# EAGLE board schematic (EAGLE 9.3.0)
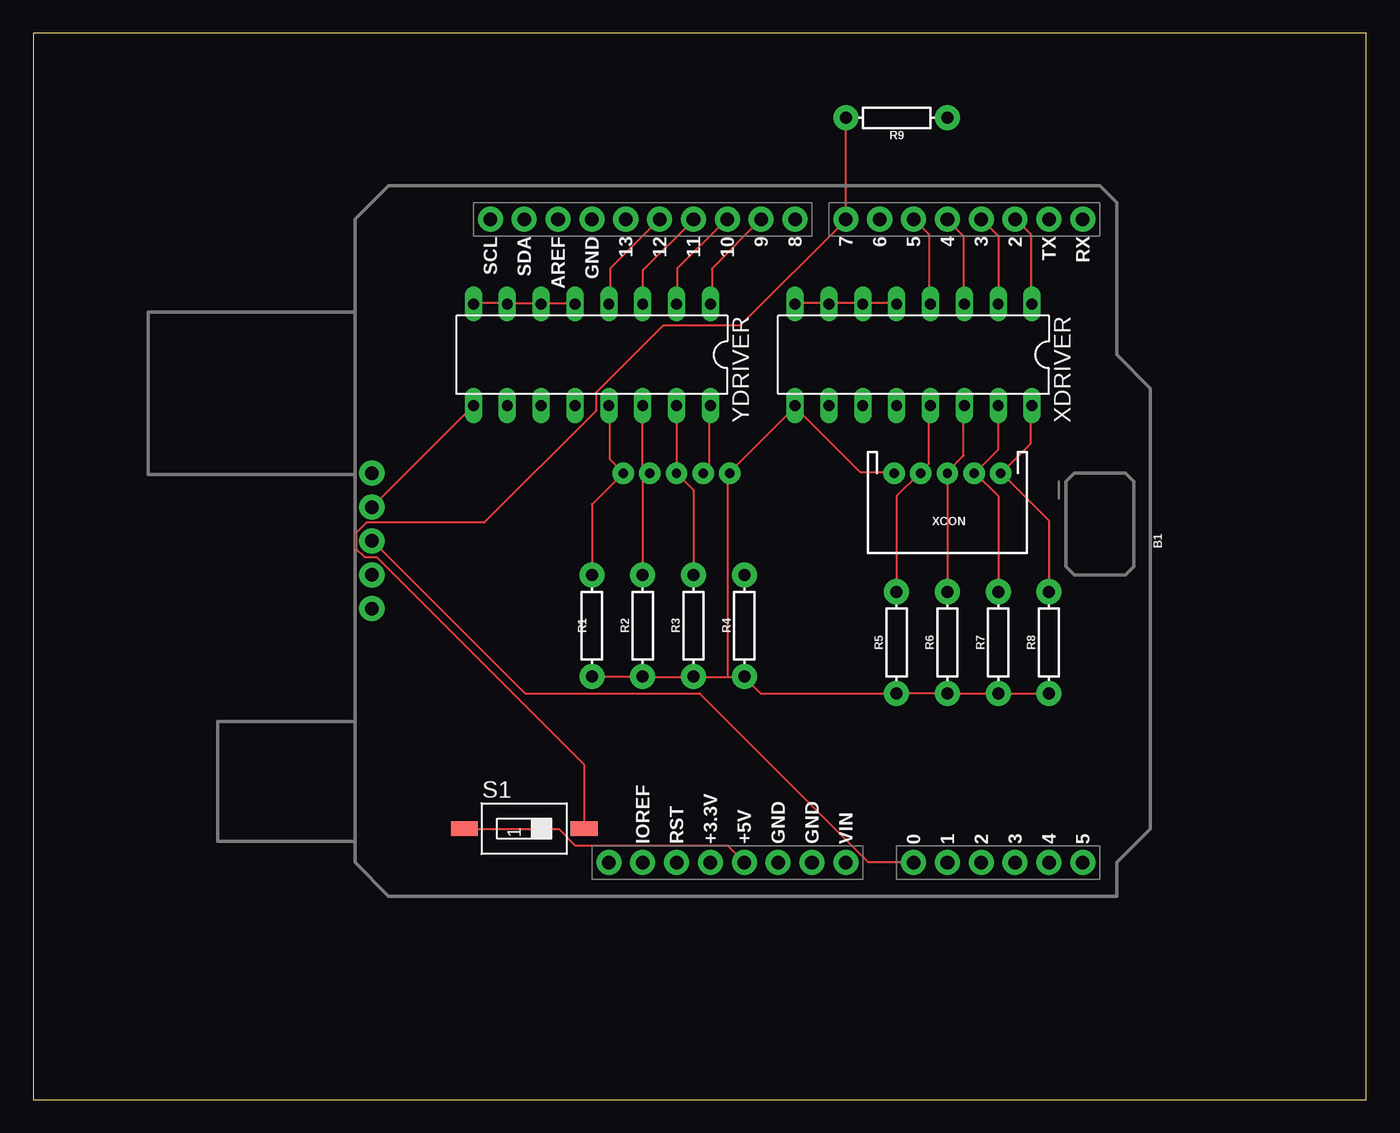
[diagram p0: board, top side]
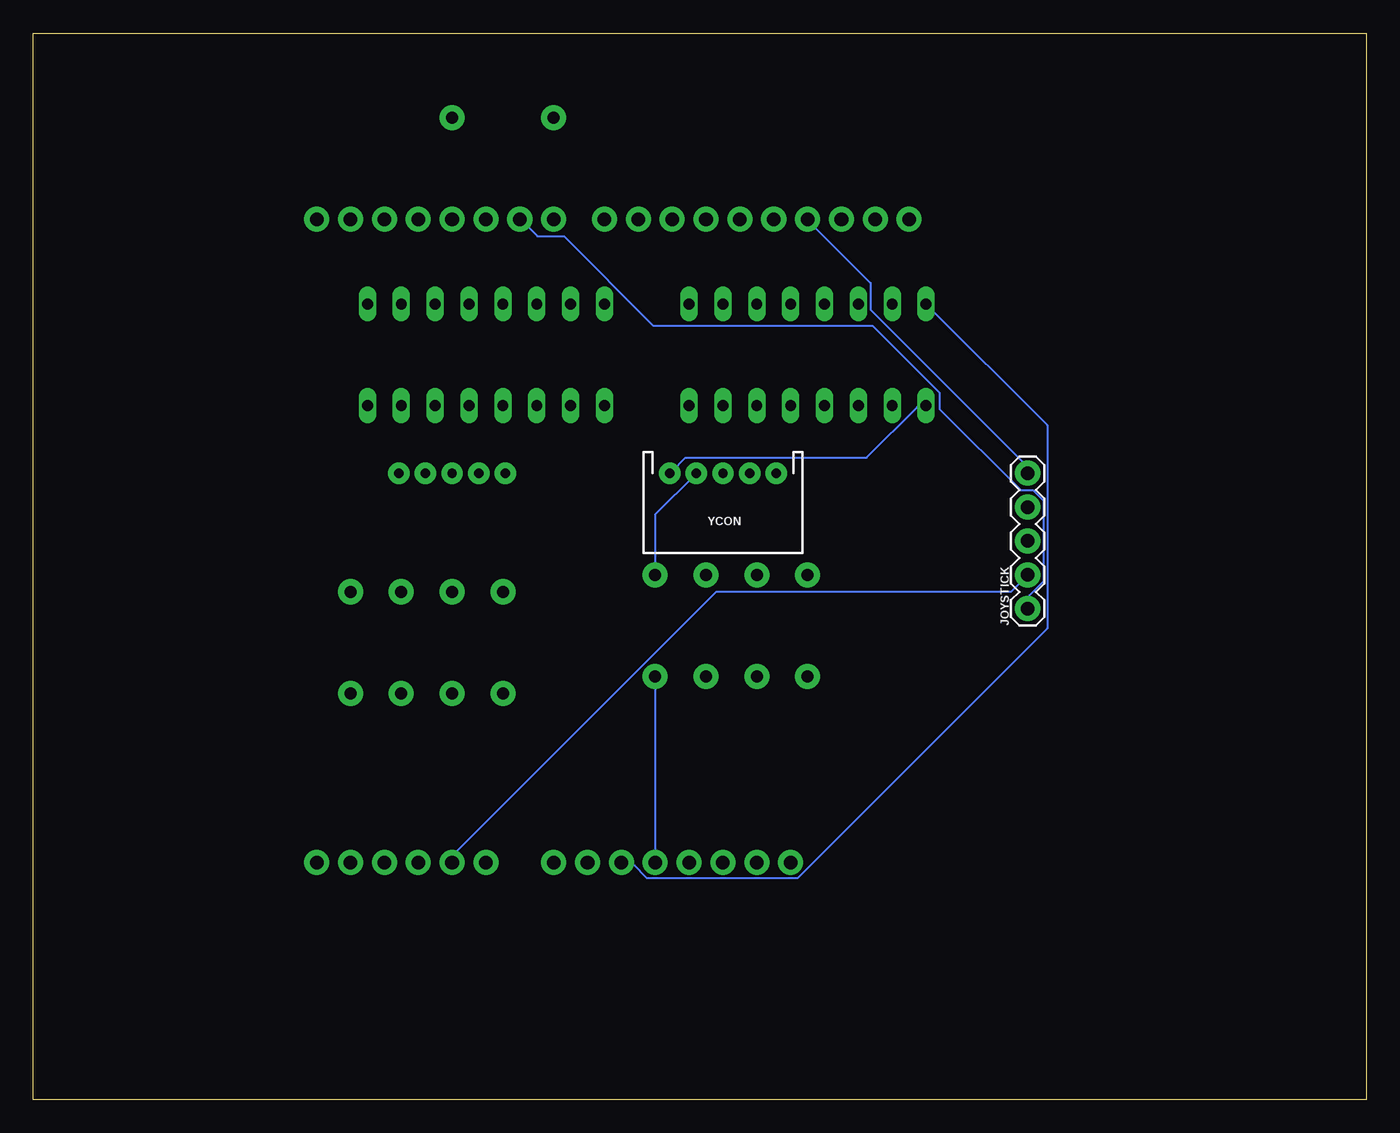
[diagram p1: board, bottom side, seen from below]

Size 100 x 80 mm. Coordinates in mm from the lower left corner, seen from the top.
Outline: 0,0 100,0 100,80 0,80 0,0
Copper layers (1*16): Top 0.035mm / dielectric 1.5mm / Bottom 0.035mm
Design rules "default": minimum track width 6mil, minimum drill 0.35mm, track to track 6mil, track to pad 6mil, pad to pad 6mil, via to via 6mil, smd to smd 6mil, copper to edge 40mil, drill to drill 6mil, minimum pad ring 10mil, minimum via ring 8mil, stop-mask expansion 4mil, vias tented up to drill 0mil, thermal gap 10mil

## Footprints (pad centres in the part's own frame; a part is rotated, then mirrored left to right if it is on the bottom)
UNO_R3_SHIELD = drill 1.016 pad 1.88: 3.3V 24.13,-2.54; 5V 24.13,0; A0 24.13,12.7; A1 24.13,15.24; A2 24.13,17.78; A3 24.13,20.32; A4 24.13,22.86; A5 24.13,25.4; AREF -24.13,-13.97; D2 -24.13,20.32; D3 -24.13,17.78; D4 -24.13,15.24; D5 -24.13,12.7; D6 -24.13,10.16; D7 -24.13,7.62; D8 -24.13,3.81; D9 -24.13,1.27; D10 -24.13,-1.27; D11 -24.13,-3.81; D12 -24.13,-6.35; D13 -24.13,-8.89; GND@0 24.13,2.54; GND@1 24.13,5.08; GND@2 -24.13,-11.43; IOREF 24.13,-7.62; NC 24.13,-10.16; RES 24.13,-5.08; RX -24.13,25.4; SCL -24.13,-19.05; SDA -24.13,-16.51; TX -24.13,22.86; VIN 24.13,7.62
1X05 = drill 1.016 pad 1.88: 1 0,0; 2 2.54,0; 3 5.08,0; 4 7.62,0; 5 10.16,0
AXIAL-0.3 = drill 0.9 pad 1.88: P$1 -3.81,0; P$2 3.81,0
SMS-001 = smd 1.092 x 2.007: 1 0,-4.496; 2 0,4.496
JST-5-PTH = drill 0.7 pad 1.6: 1 -4,0; 2 -2,0; 3 0,0; 4 2,0; 5 4,0
DIL16 = drill 0.813 long: 1 -8.89,-3.81; 2 -6.35,-3.81; 3 -3.81,-3.81; 4 -1.27,-3.81; 5 1.27,-3.81; 6 3.81,-3.81; 7 6.35,-3.81; 8 8.89,-3.81; 9 8.89,3.81; 10 6.35,3.81; 11 3.81,3.81; 12 1.27,3.81; 13 -1.27,3.81; 14 -3.81,3.81; 15 -6.35,3.81; 16 -8.89,3.81

## Placement (x,y rotation side)
B1  ARDUINO_UNO_R3_SHIELDBASIC  [UNO_R3_SHIELD]  53.34,41.91 270 top
JOYSTICK  [1X05]  25.4,36.83 90 bottom
R1  [AXIAL-0.3]  41.91,35.56 90 top
R2  [AXIAL-0.3]  45.72,35.56 90 top
R3  [AXIAL-0.3]  49.53,35.56 90 top
R4  [AXIAL-0.3]  53.34,35.56 90 top
R5  [AXIAL-0.3]  64.77,34.29 90 top
R6  [AXIAL-0.3]  68.58,34.29 90 top
R7  [AXIAL-0.3]  72.39,34.29 90 top
R8  [AXIAL-0.3]  76.2,34.29 90 top
R9  [AXIAL-0.3]  64.77,73.66 180 top
S1  SWS001  [SMS-001]  36.83,20.32 270 top
XCON  [JST-5-PTH]  68.58,46.99 180 top
XDRIVER  ULN2003AN  [DIL16]  66.04,55.88 180 top
YCON  [JST-5-PTH]  48.26,46.99 180 bottom
YDRIVER  ULN2003AN  [DIL16]  41.91,55.88 180 top

## Library data of the parts
B1 = SparkFun-Boards
JOYSTICK = SparkFun-Connectors
R1-R9 = SparkFun-Resistors
S1 = smd-special
XCON YCON = SparkFun-Connectors; SF_ID: PRT-09917
XDRIVER YDRIVER = uln-udn

## Nets
0: B1.GND@0 YDRIVER.5 YDRIVER.6 YDRIVER.7 YDRIVER.8
N$2: R4.P$2 YCON.4 YDRIVER.16
N$3: R3.P$2 YCON.3 YDRIVER.15
N$4: R2.P$2 YCON.2 YDRIVER.14
N$5: R1.P$2 YCON.1 YDRIVER.13
N$7: XDRIVER.5 XDRIVER.6 XDRIVER.7 XDRIVER.8
N$8: R8.P$2 XCON.1 XDRIVER.16
N$9: R7.P$2 XCON.2 XDRIVER.15
N$10: R6.P$2 XCON.3 XDRIVER.14
N$11: R5.P$2 XCON.4 XDRIVER.13
N$12: B1.D7 R9.P$2 S1.2
N$13: R9.P$1
N$14: B1.D6 JOYSTICK.1
N$15: B1.A1 JOYSTICK.2
N$16: B1.A0 JOYSTICK.3
N$17: B1.GND@2 JOYSTICK.5
V+: B1.5V JOYSTICK.4 R1.P$1 R2.P$1 R3.P$1 R4.P$1 R5.P$1 R6.P$1 R7.P$1 R8.P$1 S1.1 XCON.5 XDRIVER.9 YCON.5 YDRIVER.9
XPIN1: B1.D2 XDRIVER.1
XPIN2: B1.D3 XDRIVER.2
XPIN3: B1.D4 XDRIVER.3
XPIN4: B1.D5 XDRIVER.4
YPIN1: B1.D9 YDRIVER.1
YPIN2: B1.D10 YDRIVER.2
YPIN3: B1.D11 YDRIVER.3
YPIN4: B1.D12 YDRIVER.4

## Tracks (layer width: path | path; a pad name or v marks a point on that pad's centre or on a via)
0
  Top 0.152: YDRIVER.8 33.07,59.74 35.51,59.74 YDRIVER.7 35.66,59.74 38.1,59.74 | 38.1,59.74 40.54,59.74 YDRIVER.5 | 38.1,59.74 YDRIVER.6
  Bottom 0.152: YDRIVER.8 23.93,50.6 23.93,35.36 42.67,16.61 53.95,16.61 55.02,17.68 55.78,17.68 B1.GND@0
N$2
  Top 0.152: YDRIVER.16 50.75,51.97 50.75,47.55 50.29,47.09 YCON.4
  Bottom 0.152: R4.P$2 53.34,43.89 50.29,46.94 YCON.4
N$3
  Top 0.152: YDRIVER.15 48.31,51.97 48.31,47.09 YCON.3 49.53,45.72 R3.P$2
N$4
  Top 0.152: YDRIVER.14 45.72,47.55 46.18,47.09 YCON.2 46.18,46.94 45.72,46.48 R2.P$2
N$5
  Top 0.152: YDRIVER.13 43.28,51.97 43.28,48.01 44.2,47.09 YCON.1 44.2,46.94 41.91,44.65 R1.P$2
N$7
  Top 0.152: XDRIVER.8 57.15,59.74 59.59,59.74 XDRIVER.7 59.74,59.74 62.18,59.74 XDRIVER.6 62.33,59.74 64.77,59.74 XDRIVER.5
N$8
  Top 0.152: XDRIVER.16 74.83,51.97 74.83,49.23 72.69,47.09 XCON.1 72.69,46.94 76.2,43.43 R8.P$2
N$9
  Top 0.152: XDRIVER.15 72.39,48.77 70.71,47.09 XCON.2 70.71,46.94 72.39,45.26 R7.P$2
N$10
  Top 0.152: XDRIVER.14 69.8,51.97 69.8,48.31 68.58,47.09 XCON.3 R6.P$2
N$11
  Top 0.152: XDRIVER.13 67.21,51.97 67.21,47.7 66.6,47.09 XCON.4 66.45,46.94 64.77,45.26 R5.P$2
N$12
  Top 0.152: S1.2 41.3,20.42 41.3,25.15 25.76,40.69 24.84,40.69 24.23,41.3 24.23,42.52 24.99,43.28 33.83,43.28 42.22,51.66 42.22,53.03 47.24,58.06 53.03,58.06 60.96,65.99 B1.D7 R9.P$2
N$14
  Bottom 0.152: JOYSTICK.1 25.3,36.88 25.3,37.8 24.23,38.86 24.23,44.96 24.99,45.72 25.91,45.72 32,51.82 32,53.03 37.03,58.06 53.49,58.06 60.2,64.77 62.18,64.77 63.4,65.99 B1.D6
N$15
  Bottom 0.152: B1.A1 68.58,18.29 48.77,38.1 26.67,38.1 JOYSTICK.2
N$16
  Top 0.152: B1.A0 65.99,17.83 62.64,17.83 49.99,30.48 36.88,30.48 25.45,41.91 JOYSTICK.3
N$17
  Bottom 0.152: JOYSTICK.5 25.45,47.09 25.45,47.55 37.19,59.28 37.19,61.27 41.91,65.99 B1.GND@2
V+
  Top 0.152: JOYSTICK.4 YDRIVER.9 | 57.15,51.97 52.27,47.09 YCON.5 52.12,46.94 52.12,31.7 | 57.15,51.97 62.03,47.09 64.47,47.09 XCON.5 | 57.15,51.97 XDRIVER.9 | S1.1 32.46,20.27 39.47,20.27 40.69,19.05 52.12,19.05 53.34,17.83 B1.5V | R8.P$1 R7.P$1 R6.P$1 R5.P$1 54.56,30.48 53.34,31.7 | 45.72,31.7 41.91,31.7 R1.P$1 | 45.72,31.7 49.53,31.7 | 45.72,31.7 R2.P$1 | 49.53,31.7 52.12,31.7 | 52.12,31.7 53.34,31.7 | 49.53,31.7 R3.P$1 | 53.34,31.7 R4.P$1
  Bottom 0.152: YDRIVER.9 33.07,51.97 33.68,51.97 37.49,48.16 51.05,48.16 52.12,47.09 YCON.5 | R4.P$1 B1.5V
XPIN1
  Top 0.152: XDRIVER.1 74.83,59.74 74.83,64.92 73.76,65.99 B1.D2
XPIN2
  Top 0.152: XDRIVER.2 72.39,64.77 B1.D3
XPIN3
  Top 0.152: XDRIVER.3 69.8,59.74 69.8,64.77 68.58,65.99 B1.D4
XPIN4
  Top 0.152: XDRIVER.4 67.21,59.74 67.21,64.92 66.14,65.99 B1.D5
YPIN1
  Top 0.152: B1.D9 50.9,62.33 50.9,59.74 YDRIVER.1
YPIN2
  Top 0.152: YDRIVER.2 48.31,59.74 48.31,62.33 51.97,65.99 B1.D10
YPIN3
  Top 0.152: YDRIVER.3 45.72,62.18 49.53,65.99 B1.D11
YPIN4
  Top 0.152: B1.D12 43.28,62.33 43.28,59.74 YDRIVER.4